# Allegro board sensor_board.brd
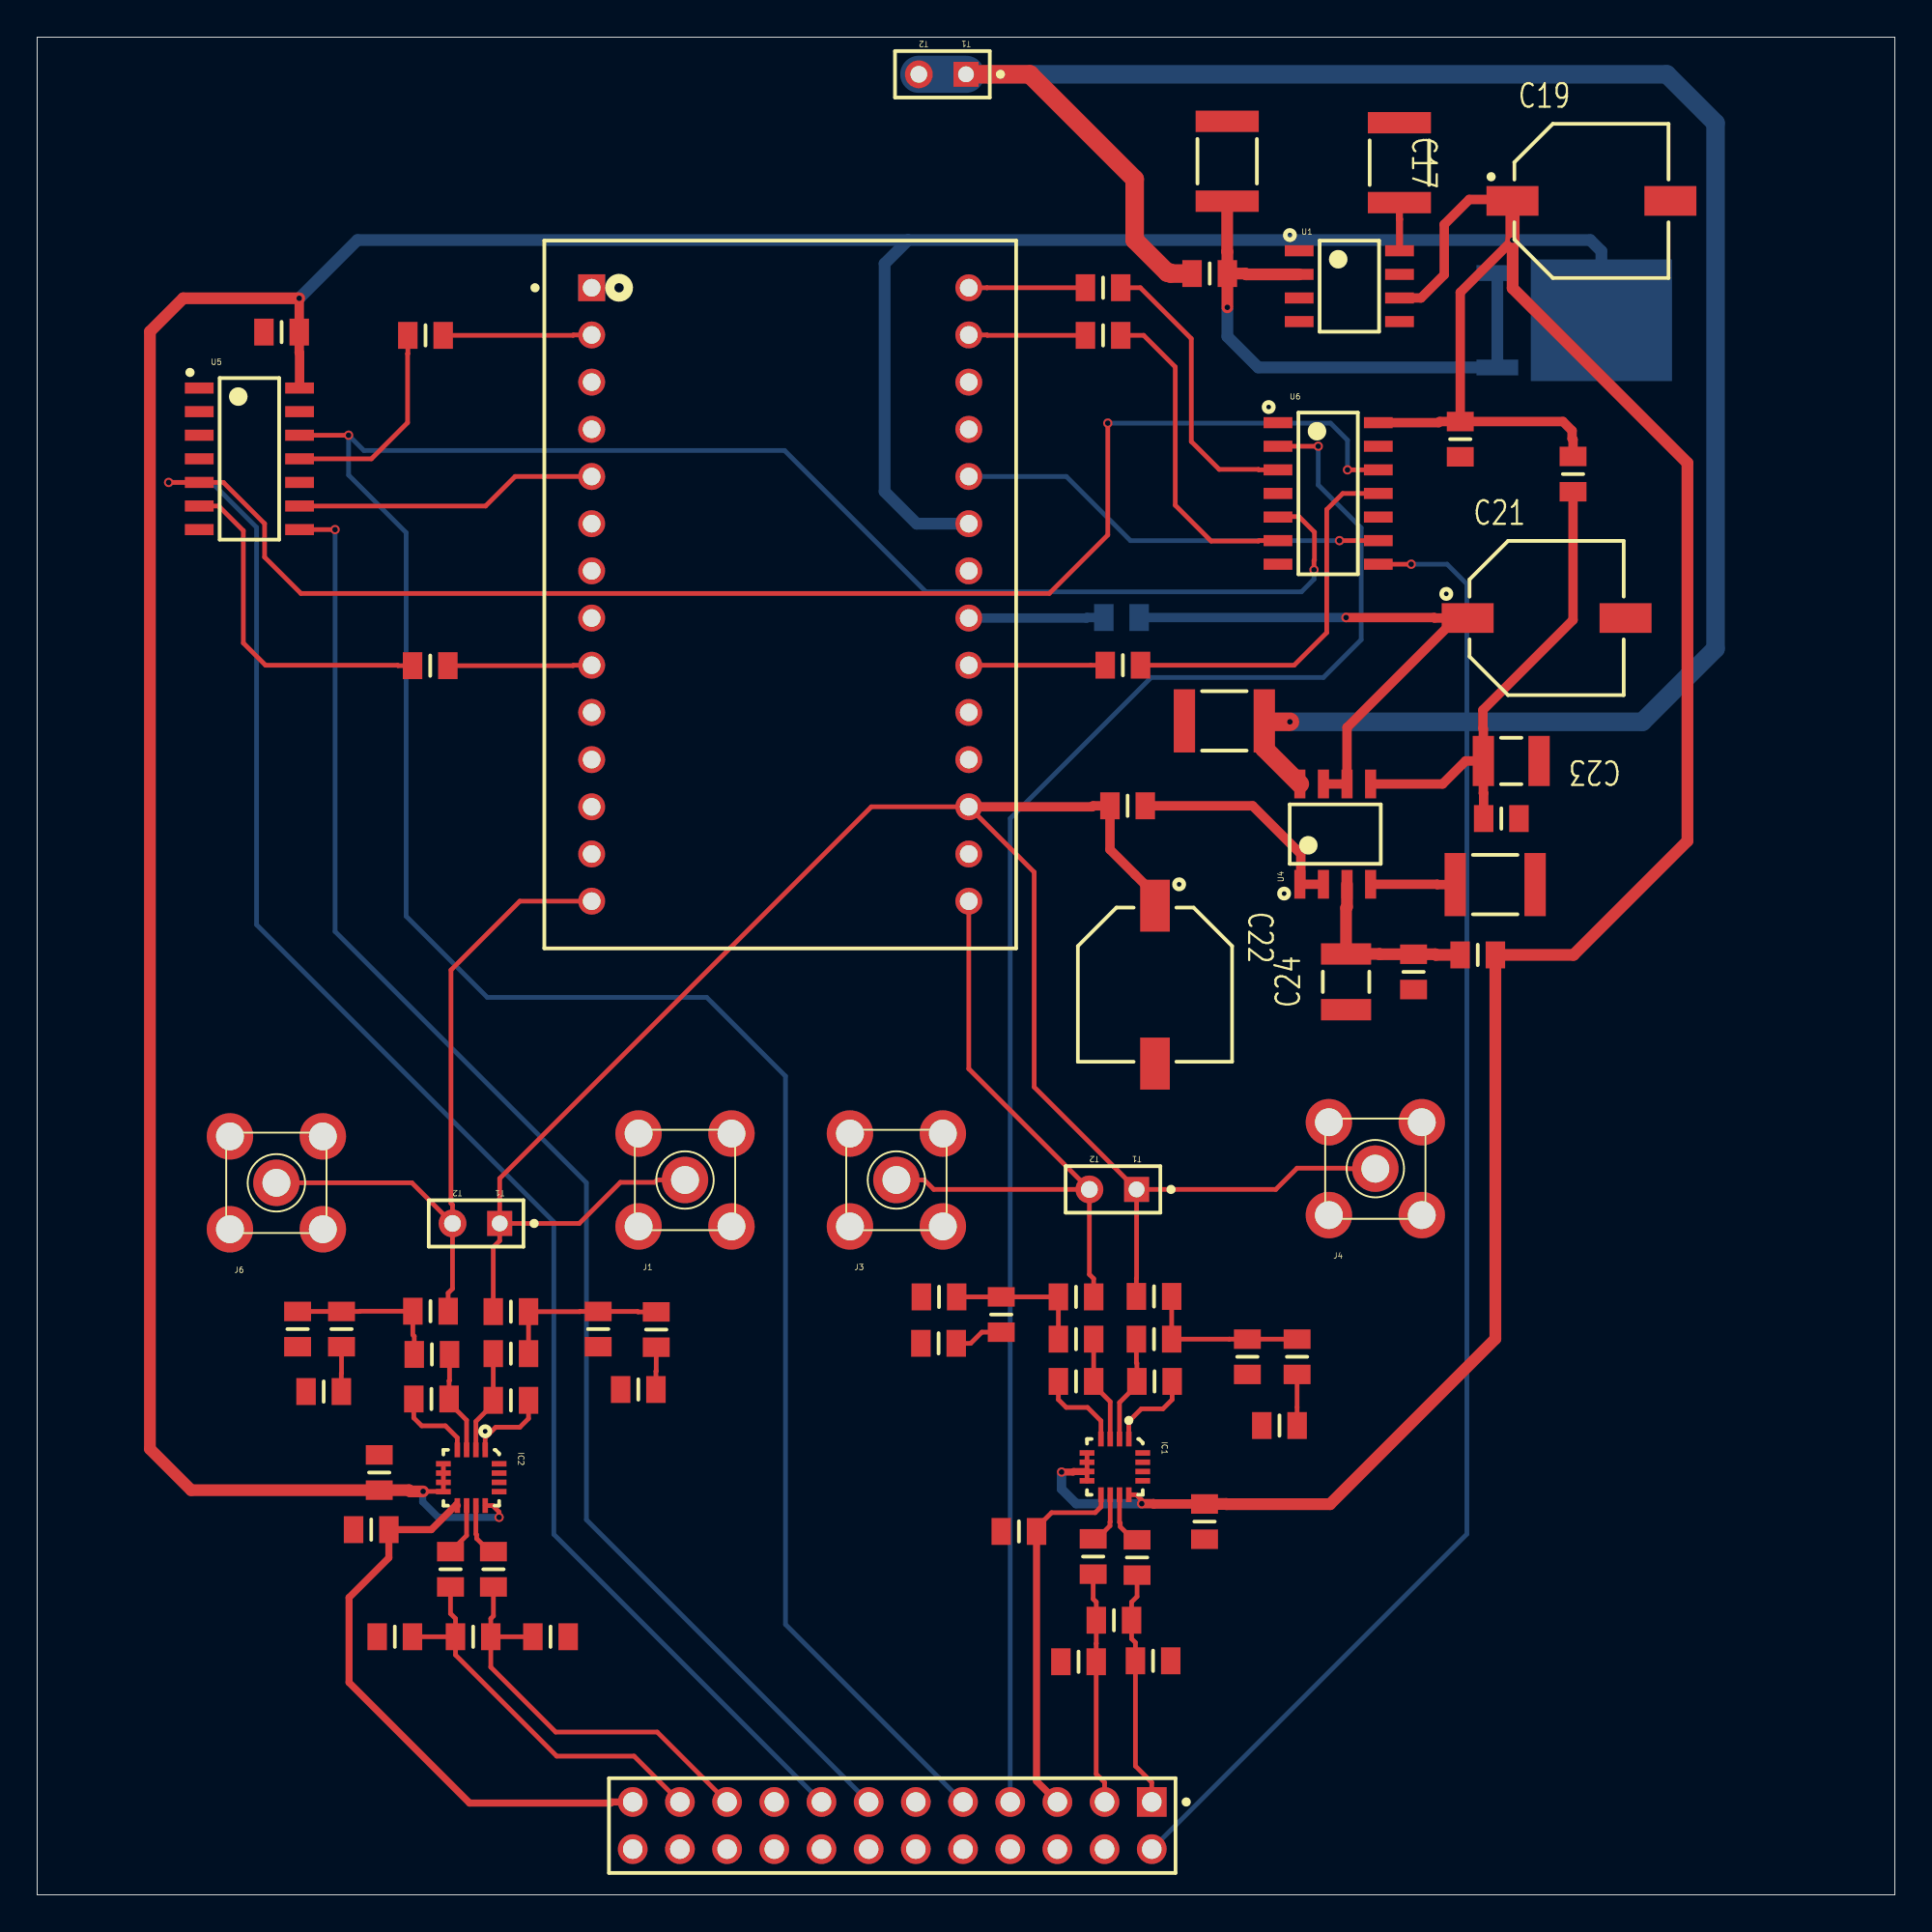
[diagram p0: board, top side]
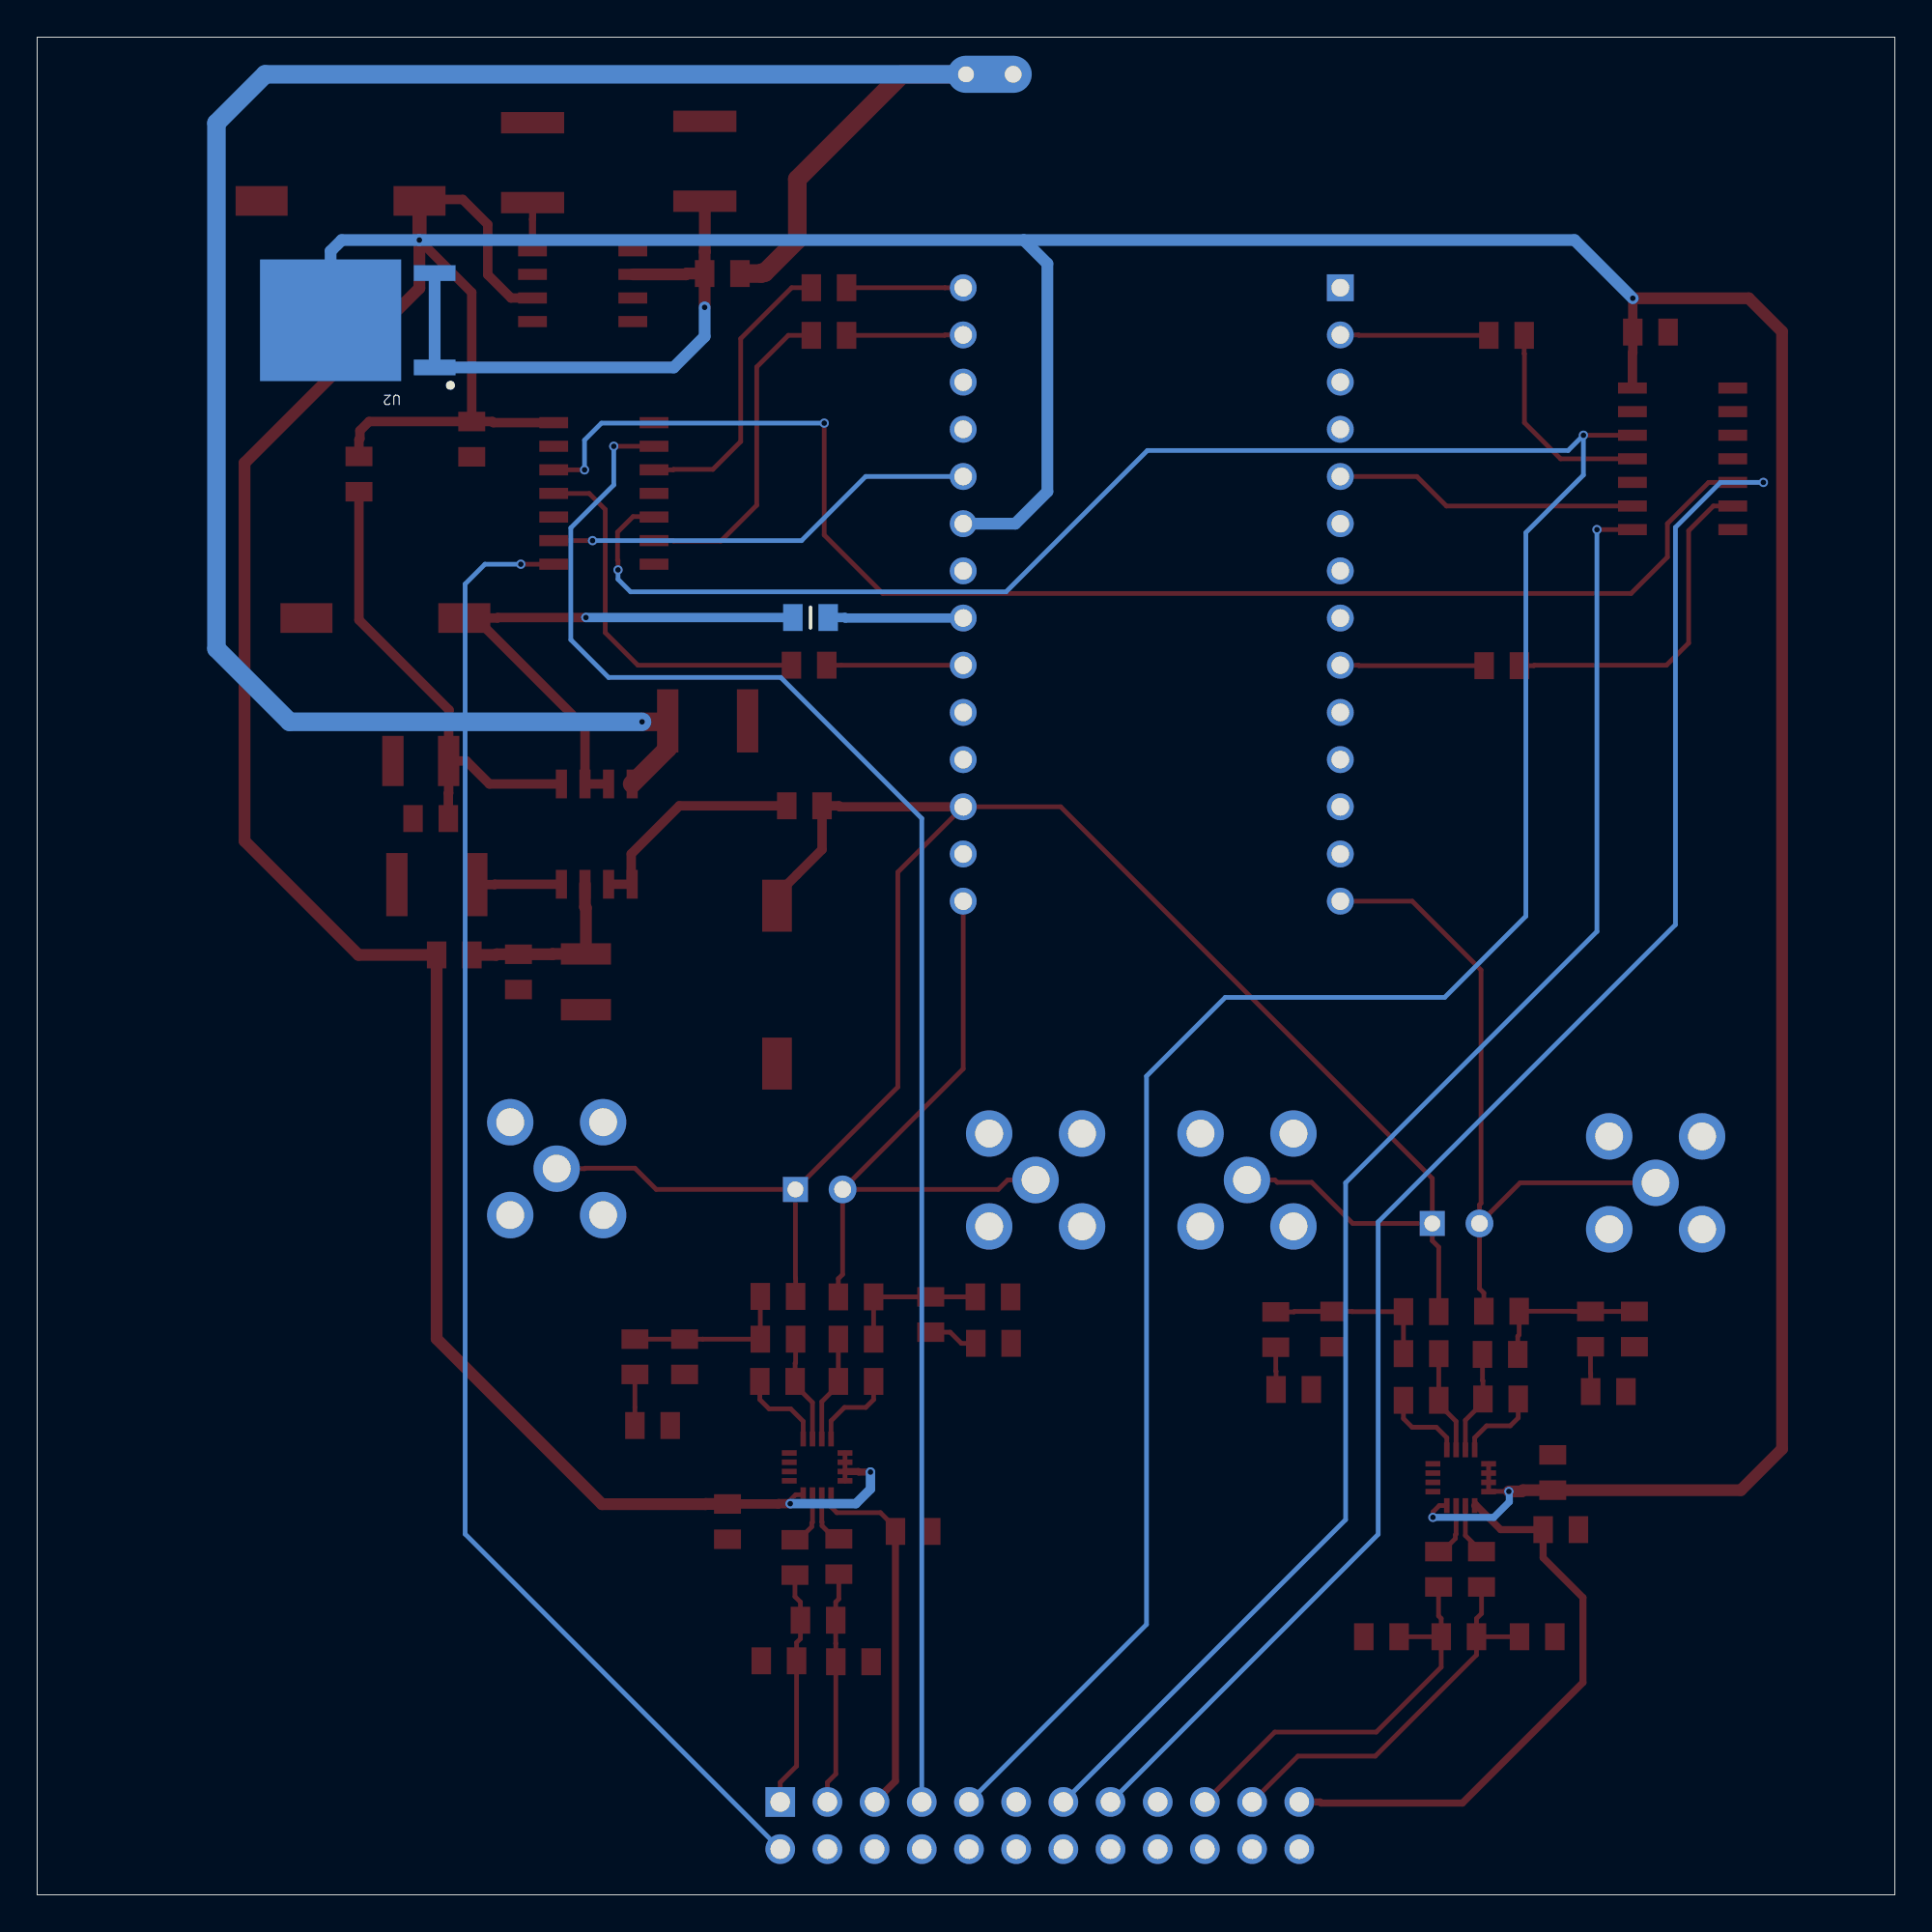
[diagram p1: board, bottom side, seen from below]

Outline 100 x 100 mm; copper layers: TOP, BOTTOM. Coordinates in mm from the lower left corner of the outline.
Outline path: 0,100 0,0 100,0 100,100 0,100

## Design rules (mm)
net group DP9: nets 0AD_IN+ 0AD_IN-
net group DP10: nets VIDEO0 VREF
net group DP11: nets 1AD_IN+ 1AD_IN-
net group DP13: nets N297867 N297875
net group DP14: nets N297667 N297695

## Placement (name value [footprint] x y rotation side)
C1  DNP  [0805]  67.82 28.96 90 top
C2  DNP  [0805]  65.15 28.96 90 top
C3  0.1uF  [0805]  60.07 12.6 180 top
C4  0.1uF  [0805]  57.96 14.78 180 top
C5  0.1uF  [0805]  56.06 12.55 180 top
C6  DNP  [0805]  51.9 31.24 270 top
C7  0.1uF  [0805]  62.84 20.09 270 top
C8  0.1uF  [0805]  52.85 19.56 180 top
C9  DNP  [0805]  33.32 30.43 90 top
C10  DNP  [0805]  30.2 30.45 90 top
C11  0.1uF  [0805]  27.64 13.89 180 top
C12  0.1uF  [0805]  23.47 13.89 180 top
C13  0.1uF  [0805]  19.25 13.89 180 top
C14  DNP  [0805]  16.38 30.45 270 top
C15  0.1uF  [0805]  18.41 22.73 90 top
C16  0.1uF  [0805]  17.98 19.66 180 top
C17  CAP NP  [1812]  73.33 93.24 270 top
C18  CAP NP  [1812]  64.06 93.32 270 top
C19  CAPACITOR POL/SM  [AEC1]  83.67 91.19 0 top
C20  CAP NP  [1812]  63.91 63.2 0 top
C21  CAPACITOR POL/SM  [AEC1]  81.25 68.73 0 top
C22  CAPACITOR POL/SM  [AEC1]  60.17 49 270 top
C23  CAP NP  [1210]  79.35 61.04 180 top
C24  CAP NP  [1210]  70.46 49.15 90 top
C25  CAP NP  [1812]  78.49 54.38 180 top
C26  0.1uF  [0805]  13.16 84.12 0 top
C27  0.1uF  [0805]  76.61 78.36 90 top
IC1  ada4932  [ADA4932]  58.01 23.04 270 top
IC2  ada4932  [ADA4932]  23.37 22.45 270 top
J1  smb  [SMB]  34.87 38.48 0 top
J2  header1  [P12]  59.18 37.97 180 top
J3  smb  [SMB]  46.25 38.48 0 top
J4  smb  [SMB]  72.03 39.09 0 top
J5  header1  [P12]  24.9 36.14 180 top
J6  smb  [SMB]  12.88 38.33 0 top
J7  p2l12  [P2L12]  60 5 180 top
J8  header1  [P12]  50 98 180 top
R1  DNP  [0805]  66.87 25.26 180 top
R2  33  [0805]  59.21 18.16 270 top
R3  0R  [0805]  60.12 32.21 0 top
R4  499  [0805]  60.12 29.91 180 top
R5  499  [0805]  60.15 27.64 0 top
R6  0R  [0805]  55.92 32.19 180 top
R7  499  [0805]  55.92 29.91 0 top
R8  499  [0805]  55.92 27.64 180 top
R9  33  [0805]  56.85 18.21 270 top
R10  DNP  [0805]  48.52 29.69 180 top
R11  DNP  [0805]  48.55 32.19 180 top
R12  DNP  [0805]  32.36 27.2 180 top
R13  33  [0805]  24.56 17.53 270 top
R14  0R  [0805]  25.5 31.39 0 top
R15  499  [0805]  25.5 29.13 180 top
R16  499  [0805]  25.5 26.62 0 top
R17  0R  [0805]  21.17 31.42 180 top
R18  499  [0805]  21.25 29.09 0 top
R19  499  [0805]  21.22 26.69 180 top
R20  33  [0805]  22.25 17.53 270 top
R21  DNP  [0805]  14.02 30.45 270 top
R22  DNP  [0805]  15.42 27.09 180 top
R23  15k  [0805]  63.12 87.27 0 top
R24  0  [0805]  57.38 86.51 0 top
R25  0  [0805]  20.9 83.95 0 top
R26  0  [0805]  57.38 83.95 0 top
R27  0  [0805]  21.16 66.17 0 top
R28  0  [0805]  58.45 66.19 0 top
R29  10  [0805]  58.7 58.62 0 top
R30  10  [0805]  58.37 68.76 180 bottom
R31  15k  [0805]  77.55 50.6 180 top
R32  2.2k  [0805]  82.68 76.48 90 top
R33  5.1k  [0805]  74.09 49.68 90 top
R34  18k  [0805]  78.82 57.94 180 top
U1  AD586J  [AD586]  70.64 86.59 0 top
U2  -  [A1385]  82.75 84.76 0 bottom
U3  G9214  [SENSOR]  40 70 0 top
U4  -  [LT1112]  69.88 57.1 90 top
U5  74hct125  [74LCT125]  11.43 77.3 0 top
U6  74hct125  [74LCT125]  69.49 75.44 0 top

## Library data of the parts
C1-C6 C8-C14 C16 C26 C27 = CAPACITOR NON-POL
C7 C15 C17 C18 C20 C23-C25 = CAP NP
C19 C21 C22 = CAPACITOR POL/SM
IC1 IC2 = ada4932
J1 J3 J4 J6 = smb
J2 J5 J8 = header1
J7 = p2l12
R1-R34 = R
U1 = AD586J
U2 = A1385
U3 = G9214
U4 = LT1112
U5 U6 = 74hct125

## Footprints (pads in the part's own frame, mm; a bottom-side part is the same pattern mirrored in y, then rotated)
74LCT125
  rect 1.55x0.6 smd: 1(-2.7,3.81) 2(-2.7,2.54) 3(-2.7,1.27) 4(-2.7,0) 5(-2.7,-1.27) 6(-2.7,-2.54) 7(-2.7,-3.81) 8(2.7,-3.81) 9(2.7,-2.54) 10(2.7,-1.27) 11(2.7,0) 12(2.7,1.27) 13(2.7,2.54) 14(2.7,3.81)
0805
  rect 1.05x1.45 smd: 1(-0.95,0) 2(0.95,0)
1210
  rect 1.15x2.7 smd: 1(-1.5,0) 2(1.5,0)
1812
  rect 1.15x3.4 smd: 1(-2.15,0) 2(2.15,0)
A1385
  rect 2.25x0.85 smd: 1(-4.15,2.54) 2(-4.15,-2.54)
  rect 7.6x6.55 smd: 3(1.45,0)
AD586
  rect 1.55x0.6 smd: 1(-2.7,1.905) 2(-2.7,0.635) 3(-2.7,-0.635) 4(-2.7,-1.905) 5(2.7,-1.905) 6(2.7,-0.635) 7(2.7,0.635) 8(2.7,1.905)
ADA4932
  rect 0.8x0.3 smd: 1(-1.5,0.75) 2(-1.5,0.25) 3(-1.5,-0.25) 4(-1.5,-0.75) 9(1.5,-0.75) 10(1.5,-0.25) 11(1.5,0.25) 12(1.5,0.75)
  rect 0.3x0.8 smd: 5(-0.75,-1.5) 6(-0.25,-1.5) 7(0.25,-1.5) 8(0.75,-1.5) 13(0.75,1.5) 14(0.25,1.5) 15(-0.25,1.5) 16(-0.75,1.5)
AEC1
  rect 2.8x1.6 smd: 1(-4.25,0) 2(4.25,0)
LT1112
  rect 1.55x0.6 smd: 1(-2.7,1.905) 2(-2.7,0.635) 3(-2.7,-0.635) 4(-2.7,-1.905) 5(2.7,-1.905) 6(2.7,-0.635) 7(2.7,0.635) 8(2.7,1.905)
P2L12
  rect 1.6x1.6 hole 1.05: 1(0,0)
  round 1.6 hole 1.05: 2(0,2.54) 3(2.54,0) 4(2.54,2.54) 5(5.08,0) 6(5.08,2.54) 7(7.62,0) 8(7.62,2.54) 9(10.16,0) 10(10.16,2.54) 11(12.7,0) 12(12.7,2.54) 13(15.24,0) 14(15.24,2.54) 15(17.78,0) 16(17.78,2.54) 17(20.32,0) 18(20.32,2.54) 19(22.86,0) 20(22.86,2.54) 21(25.4,0) 22(25.4,2.54) 23(27.94,0) 24(27.94,2.54)
P12
  rect 1.35x1.35 hole 0.85: 1(0,0)
  round 1.5 hole 0.9: 2(2.54,0)
SENSOR
  rect 1.45x1.45 hole 0.95: 1(-10.15,16.51)
  round 1.45 hole 0.95: 2(-10.15,13.97) 3(-10.15,11.43) 4(-10.15,8.89) 5(-10.15,6.35) 6(-10.15,3.81) 7(-10.15,1.27) 8(-10.15,-1.27) 9(-10.15,-3.81) 10(-10.15,-6.35) 11(-10.15,-8.89) 12(-10.15,-11.43) 13(-10.15,-13.97) 14(-10.15,-16.51) 15(10.15,-16.51) 16(10.15,-13.97) 17(10.15,-11.43) 18(10.15,-8.89) 19(10.15,-6.35) 20(10.15,-3.81) 21(10.15,-1.27) 22(10.15,1.27) 23(10.15,3.81) 24(10.15,6.35) 25(10.15,8.89) 26(10.15,11.43) 27(10.15,13.97) 28(10.15,16.51)
SMB
  round 2.5 hole 1.5: 1(0,0) 2(-2.5,2.5) 3(2.5,2.5) 4(-2.5,-2.5) 5(2.5,-2.5)

## Nets
0VCM: C16.1 IC2.9(VCM) J7.23
1VCM: C8.1 IC1.9(VCM) J7.5
GND: C2.1 C3.1 C5.2 C7.2 C8.2 C10.1 C11.1 C13.2 C15.2 C16.2 C17.1 C18.1 C19.2 C20.1 C21.2 C22.2 C23.1 C24.1 C25.1 C26.1 C27.1 IC1.13(VS1-) IC1.14(VS2-) IC1.15(VS3-) IC1.16(VS4-) IC2.13(VS1-) IC2.14(VS2-) IC2.15(VS3-) IC2.16(VS4-) J1.2(S1) J1.3(S2) J1.4(S3) J1.5(S4) J3.2(S1) J3.3(S2) J3.4(S3) J3.5(S4) J4.2(S1) J4.3(S2) J4.4(S3) J4.5(S4) J6.2(S1) J6.3(S2) J6.4(S3) J6.5(S4) J7.4 J7.6 J7.8 J7.10 J7.11 J7.12 J7.14 J7.16 J7.17 J7.18 J7.20 J7.22 J7.24 R1.2 R10.2 R11.2 R12.2 R21.2 R22.2 R33.1 R34.1 U3.22(VSS) U5.4(2O\E\) U5.7(GND) U5.10(3O\E\) U5.13(4O\E\) U6.1(1O\E\) U6.4(2O\E\) U6.7(GND) U6.10(3O\E\) U6.13(4O\E\)
VDD5: C7.1 C15.1 C19.1 C26.2 C27.2 IC1.5(VS1+) IC1.6(VS2+) IC1.7(VS3+) IC1.8(VS4+) IC1.12(P\D\) IC2.5(VS1+) IC2.6(VS2+) IC2.7(VS3+) IC2.8(VS4+) IC2.12(P\D\) R31.1 R32.2 U1.6(VOUT) U2.3 U3.23(VDD) U5.14(VCC) U6.14(VCC)
0AD_IN+: C12.2 C13.1 J7.21 R20.2
0AD_IN-: C11.2 C12.1 J7.19 R13.2
1AD_IN+: C4.2 C5.1 J7.3 R9.2
1AD_IN-: C3.2 C4.1 J7.1 R2.2
CF_IN: J7.7 U6.2(1A)
CF_SEL: R24.2 U6.3(1Y)
CLK0: R27.1 U5.6(2Y)
CLK1: R28.2 U6.11(4Y)
CLK_IN: J7.15 U5.5(2A) U6.12(4A)
DC12V: C20.2 J8.1 J8.2 R23.1 U4.8(V+)
INP: R30.2 U3.21(INP)
RST0: R25.1 U5.11(4Y)
RST1: R26.2 U6.6(2Y)
RST_IN: J7.9 U5.12(4A) U6.5(2A)
TRIG0: U3.5(TRIG0) U5.9(3A)
TRIG0_OUT: J7.13 U5.8(3Y)
TRIG1: U3.24(TRIG1) U6.9(3A)
TRIG1_OUT: J7.2 U6.8(3Y)
VIDEO0: J5.2 J6.1(CENTER) R17.1 U3.14(VIDEO0)
VIDEO1: J2.2 J3.1(CENTER) R6.1 U3.15(VIDEO1)
VREF: C22.1 J1.1(CENTER) J2.1 J4.1(CENTER) J5.1 R3.1 R14.1 R29.1 U3.17(VREF)
N294469: C21.1 R30.1 U4.6(-INB) U4.7(OUTB)
N294559: C23.2 R32.1 R34.2 U4.5(+INB)
N294707: R29.2 U4.1(OUTA) U4.2(-INA)
N294729: C24.2 R31.2 R33.2 U4.3(+INA)
N294815: C25.2 U4.4(-V)
N294905: C18.2 R23.2 U1.2(+VIN) U2.1 U2.2
N297655: IC1.4(FB+) R8.2
N297667: IC1.3(IN-) R7.2 R8.1
N297679: C1.2 C2.2 R3.2 R4.1
N297691: IC1.1(FB-) R5.2
N297695: IC1.2(IN+) R4.2 R5.1
N297703: C6.1 R6.2 R7.1 R11.1
N297867: IC1.11(OUT-) R2.1
N297875: IC1.10(OUT+) R9.1
N298547: IC2.4(FB+) R19.2
N298555: IC2.3(IN-) R18.2 R19.1
N298571: IC2.2(IN+) R15.2 R16.1
N298575: C9.2 C10.2 R14.2 R15.1
N298583: C14.1 R17.2 R18.1 R21.1
N298595: IC2.1(FB-) R16.2
N298759: IC2.10(OUT+) R20.1
N298771: C9.1 R12.1
N298779: IC2.11(OUT-) R13.1
N310265: R26.1 U3.27(RST1)
N310330: R24.1 U3.28(CF_SELECT)
N310347: R25.2 U3.2(RST0)
N310497: R27.2 U3.9(CLK0)
N310503: R28.1 U3.20(CLK1)
N312884: C1.1 R1.1
N2948397: C17.2 U1.8(N_R)
N2973431: C6.2 R10.1
N2982271: C14.2 R22.1

Pads without a net: U1 1 3 4 5 7; U3 1 3 4 6 7 8 10 11 12 13 16 18 19 25 26; U5 1 2 3

## Via types
v1: diameter 0.5, hole 0.3, TOP to BOTTOM, 18 vias

## Routing (per net, layer and track width the routed paths; a pad name or vN(x,y) marks a point on that pad's centre or on a via; arc(x,y) is an arc through that point)
0VCM: length 31.4
  TOP w0.381: J7.23 30.94,5 30.88,4.94 23.28,4.94 16.79,11.43 16.79,16 18.93,18.15 C16.1 21.22,19.66 22.57,21.01 IC2.9
1VCM: length 19.8
  TOP w0.254: IC1.9 57.26,20.88 56.95,20.57 54.61,20.57 53.8,19.76 C8.1
  TOP w0.381: J7.5 53.8,6.12 C8.1
VDD5: length 329.9
  TOP w0.254: IC2.5 IC2.6 IC2.7 IC2.8 21.85,21.72 v1(20.78,21.72) ; IC1.12 59.17,21.54 59.46,21.24 v1(59.46,21.06) ; v1(24.87,20.32) 24.87,20.61 24.52,20.95 IC2.12 ; IC1.5 IC1.6 IC1.7 IC1.8 56.5,22.28
  TOP w0.381: v1(55.14,22.76) 55.77,22.76 55.8,22.79 IC1.7
  TOP w0.508: C7.1 60.11,21.04 60.09,21.06 v1(59.46,21.06) ; C27.2 82.13,79.31 82.63,78.82 82.63,78.39 82.68,78.34 R32.2 ; C27.2 76.61,86.26 v1(79.43,89.08) ; C27.2 75.5,79.31 75.44,79.25 U6.14 ; v1(14.11,85.94) C26.2 14.11,83.02 14.13,83 U5.14 ; C19.1 79.34,91.26 77.09,91.26 75.74,89.92 75.74,87.21 74.49,85.96 U1.6
  TOP w0.635: v1(79.43,89.08) 79.43,86.49 88.84,77.08 88.84,56.73 82.7,50.6 R31.1 78.5,29.93 69.6,21.03 64.02,21.03 64.01,21.04 C7.1 ; v1(20.78,21.72) 20.08,21.72 20.02,21.78 C15.1 8.29,21.78 6.07,24 6.07,84.15 7.86,85.94 v1(14.11,85.94)
  TOP w0.762: C19.1 79.42,89.09 v1(79.43,89.08)
  BOTTOM w0.381: v1(20.78,21.72) 20.75,21.69 20.75,21.16 21.59,20.32 v1(24.87,20.32)
  BOTTOM w0.508: v1(59.46,21.06) 55.93,21.06 55.14,21.84 v1(55.14,22.76)
  BOTTOM w0.635: 46.89,89.08 17.24,89.08 v1(14.11,85.94) ; 46.89,89.08 45.62,87.81 45.62,75.54 47.35,73.81 U3.23 ; 46.89,89.08 v1(79.43,89.08) 83.6,89.08 84.2,88.48 U2.3
0AD_IN+: length 21.4
  TOP w0.254: R20.2 22.25,15.14 22.52,14.87 C12.2 ; C13.1 C12.2 ; C12.2 22.52,12.91 27.97,7.47 32.13,7.47 J7.21
0AD_IN-: length 22.4
  TOP w0.254: C12.1 24.42,14.87 24.56,15.02 R13.2 ; C12.1 24.42,12.26 27.91,8.76 33.38,8.76 J7.19 ; C12.1 C11.2
1AD_IN+: length 12.5
  TOP w0.254: R9.2 56.85,15.93 57.01,15.76 C4.2 57.01,13.53 57.01,13.53 C5.1 57.01,6.51 57.46,6.05 J7.3
1AD_IN-: length 12.8
  TOP w0.254: J7.1 60,6.05 59.12,6.93 C3.2 59.12,13.58 58.91,13.79 C4.1 58.91,15.76 59.21,16.06 R2.2
CF_IN: length 89.4
  TOP w0.254: U6.2 v1(68.96,77.98)
  BOTTOM w0.254: J7.7 52.38,57.94 59.97,65.53 69.24,65.53 71.27,67.56 71.27,73.58 68.96,75.9 v1(68.96,77.98)
CF_SEL: length 15.8
  TOP w0.254: R24.2 59.39,86.51 62.13,83.77 62.13,78.23 63.63,76.73 65.74,76.73 65.77,76.71 U6.3
CLK0: length 18.6
  TOP w0.254: R27.1 19.43,66.17 19.4,66.19 12.29,66.19 11.1,67.39 11.1,73.43 9.77,74.76 U5.6
CLK1: length 20.5
  TOP w0.254: U6.11 70.28,75.44 69.42,74.57 69.42,67.94 67.67,66.19 R28.2
CLK_IN: length 164.9
  TOP w0.254: v1(57.63,79.22) 57.63,73.2 54.48,70.05 14.2,70.05 12.24,72.01 12.24,73.81 10.02,76.03 U5.5 v1(7.08,76.03) ; v1(70.54,76.71) U6.12
  BOTTOM w0.254: v1(57.63,79.22) 69.62,79.22 70.54,78.31 v1(70.54,76.71) ; v1(7.08,76.03) 9.39,76.03 11.81,73.61 11.81,52.22 27.81,36.22 27.81,19.41 J7.15
DC12V: length 120.9
  TOP w1: J8.1 53.43,98 59.08,92.35 59.08,89.08 60.83,87.33 60.97,87.33 61.02,87.27 R23.1 ; v1(67.44,63.14) 66.11,63.14 C20.2 66.06,61.71 U4.8
  BOTTOM w1: J8.1 87.72,98 90.35,95.38 90.35,67.08 86.41,63.14 v1(67.44,63.14)
  BOTTOM w2: J8.1 J8.2
INP: length 7.3
  BOTTOM w0.508: R30.2 56.51,68.76 56.49,68.73 U3.21
RST0: length 11.3
  TOP w0.254: R25.1 19.95,82.97 19.94,82.95 19.94,79.25 17.99,77.3 U5.11
RST1: length 17.4
  TOP w0.254: U6.6 65.77,72.9 65.74,72.87 63.2,72.87 61.26,74.8 61.26,82.25 59.56,83.95 R26.2
RST_IN: length 157.4
  TOP w0.254: v1(68.73,71.32) 68.73,71.83 68.76,71.85 68.76,73.36 67.92,74.19 66.82,74.19 U6.5 ; U5.12 v1(16.76,78.57)
  BOTTOM w0.254: v1(68.73,71.32) 68.73,70.82 68.06,70.14 47.84,70.14 40.23,77.75 17.59,77.75 v1(16.76,78.57) 16.76,76.43 19.86,73.33 19.86,52.68 24.23,48.31 36.04,48.31 40.28,44.07 40.28,14.56 J7.9
TRIG0: length 16.4
  TOP w0.254: U5.9 24.14,74.76 25.73,76.35 U3.5
TRIG0_OUT: length 82.3
  TOP w0.254: U5.8 v1(16.04,73.49)
  BOTTOM w0.254: v1(16.04,73.49) 16.04,51.86 29.57,38.33 29.57,20.19 J7.13
TRIG1: length 23.5
  TOP w0.254: U6.9 v1(70.1,72.9)
  BOTTOM w0.254: U3.24 55.4,76.35 58.85,72.9 v1(70.1,72.9)
TRIG1_OUT: length 80.3
  TOP w0.254: U6.8 v1(73.96,71.63)
  BOTTOM w0.254: v1(73.96,71.63) 75.9,71.63 76.96,70.56 76.96,19.42 J7.2
VIDEO0: length 38
  TOP w0.254: J6.1 20.17,38.33 J5.2 ; R17.1 22.12,32.4 22.36,32.63 J5.2 ; J5.2 22.36,37.15 22.28,37.23 22.28,49.78 25.98,53.49 U3.14
VIDEO1: length 34.7
  TOP w0.254: R6.1 56.87,33.17 56.64,33.4 J2.2 ; J2.2 50.15,44.46 U3.15 ; J2.2 48.27,37.97 47.76,38.48 J3.1
VREF: length 109.2
  TOP w0.254: R3.1 59.17,33.19 59.18,33.2 J2.1 ; J5.1 24.9,38.56 44.9,58.57 U3.17 53.67,55.05 53.67,43.48 J2.1 ; J5.1 24.9,35.21 24.55,34.87 R14.1 ; J5.1 29.18,36.14 31.39,38.35 33.24,38.35 33.37,38.48 J1.1 ; J4.1 70.53,39.09 70.5,39.12 67.82,39.12 66.67,37.97 J2.1
  TOP w0.508: U3.17 56.79,58.57 56.84,58.62 R29.1 57.75,56.27 60.17,53.85 C22.1
N294469: length 30.3
  TOP w0.508: v1(70.46,68.76) 75.2,68.76 75.22,68.73 76.4,68.73 ; 76.4,68.73 70.51,62.84 U4.6 U4.7 ; 76.4,68.73 C21.1
  BOTTOM w0.508: R30.1 v1(70.46,68.76)
N294559: length 26.2
  TOP w0.508: C23.2 77.85,59.31 77.87,59.29 R34.2 ; C23.2 77.85,62.77 77.83,62.79 77.83,63.78 82.68,68.63 R32.1 ; C23.2 76.89,61.04 75.66,59.8 U4.5
N294707: length 12.4
  TOP w0.508: U4.2 U4.1 68.02,54.45 68.02,56.03 65.43,58.62 R29.2
N294729: length 9.9
  TOP w0.635: U4.3 70.51,53.18 70.46,53.13 C24.2 72.25,50.65 72.27,50.63 R33.2 75.26,50.63 75.3,50.6 R31.2
N294815: length 4.6
  TOP w0.508: C25.2 75.38,54.38 75.36,54.4 U4.4
N294905: length 31.5
  TOP w0.635: R23.2 v1(64.07,85.46) ; R23.2 65.04,87.27 65.08,87.23 U1.2 ; R23.2 64.07,88.44 64.06,88.45 C18.2
  BOTTOM w0.635: v1(64.07,85.46) 64.07,83.89 65.74,82.22 U2.1 U2.2
N297655: length 4.7
  TOP w0.254: IC1.4 57.26,25.52 56.54,26.24 55.39,26.24 54.97,26.66 R8.2
N297667: length 5.7
  TOP w0.254: IC1.3 57.76,26.55 56.87,27.44 R8.1 R7.2
N297679: length 9.1
  TOP w0.254: R3.2 R4.1 64.17,29.91 C2.2 C1.2
N297691: length 4.7
  TOP w0.254: IC1.1 58.76,25.49 59.44,26.16 60.6,26.16 61.1,26.66 R5.2
N297695: length 5.8
  TOP w0.254: IC1.2 58.26,26.5 59.2,27.44 R5.1 59.2,28.62 59.17,28.64 R4.2
N297703: length 7.8
  TOP w0.254: R7.1 R6.2 C6.1 R11.1
N297867: length 2.9
  TOP w0.254: R2.1 59.01,19.11 58.3,19.82 58.3,20.02 58.26,20.05 IC1.11
N297875: length 2.9
  TOP w0.254: R9.1 57.05,19.16 57.75,19.87 57.75,20.07 57.76,20.08 IC1.10
N298547: length 4.5
  TOP w0.254: IC2.4 22.62,24.61 21.98,25.25 20.7,25.25 20.27,25.67 R19.2
N298555: length 5.5
  TOP w0.254: R18.2 22.2,27.7 22.17,27.67 R19.1 22.17,26.49 23.12,25.55 IC2.3
N298571: length 5.6
  TOP w0.254: R15.2 R16.1 24.55,26.42 23.62,25.49 IC2.2
N298575: length 9.1
  TOP w0.254: R15.1 R14.2 29.21,31.39 29.22,31.4 C10.2 32.32,31.4 32.35,31.38 C9.2
N298583: length 8.6
  TOP w0.254: R21.1 C14.1 17.36,31.4 17.37,31.42 R17.2 20.22,30.15 20.3,30.07 R18.1
N298595: length 4.4
  TOP w0.254: R16.2 26.45,25.64 25.98,25.17 24.68,25.17 24.12,24.61 IC2.1
N298759: length 2.8
  TOP w0.254: R20.1 23.12,19.34 IC2.10
N298771: length 2.3
  TOP w0.254: R12.1 33.31,28.18 33.32,28.2 C9.1
N298779: length 3
  TOP w0.254: IC2.11 23.62,19.42 23.66,19.38 23.66,19.18 24.36,18.48 R13.1
N310265: length 6.3
  TOP w0.254: R26.1 51.15,83.95 51.13,83.97 U3.27
N310330: length 6.3
  TOP w0.254: R24.1 51.13,86.51 51.13,86.51 U3.28
N310347: length 8
  TOP w0.254: U3.2 28.87,83.97 28.85,83.95 R25.2
N310497: length 7.8
  TOP w0.254: U3.9 28.87,66.19 28.85,66.17 R27.2
N310503: length 7.3
  TOP w0.254: R28.1 56.72,66.19 56.71,66.19 U3.20
N312884: length 2.8
  TOP w0.254: R1.1 C1.1
N2948397: length 2.6
  TOP w0.381: C17.2 73.33,90.2 73.34,90.19 U1.8
N2973431: length 2.7
  TOP w0.254: R10.1 50.25,29.69 50.85,30.29 C6.2
N2982271: length 2.4
  TOP w0.254: R22.1 16.37,28.07 16.38,28.08 C14.2
